# Altium PCB KNX-MultiExt.PcbDoc
Units mm, origin at the board's own origin, x right, y up, seen from the top; angles counter-clockwise.
Board outline 41.5 x 56.6 mm, 2 copper layers (Top Layer, Bottom Layer); 40 components, 27 nets, 123 pads, 29 vias.
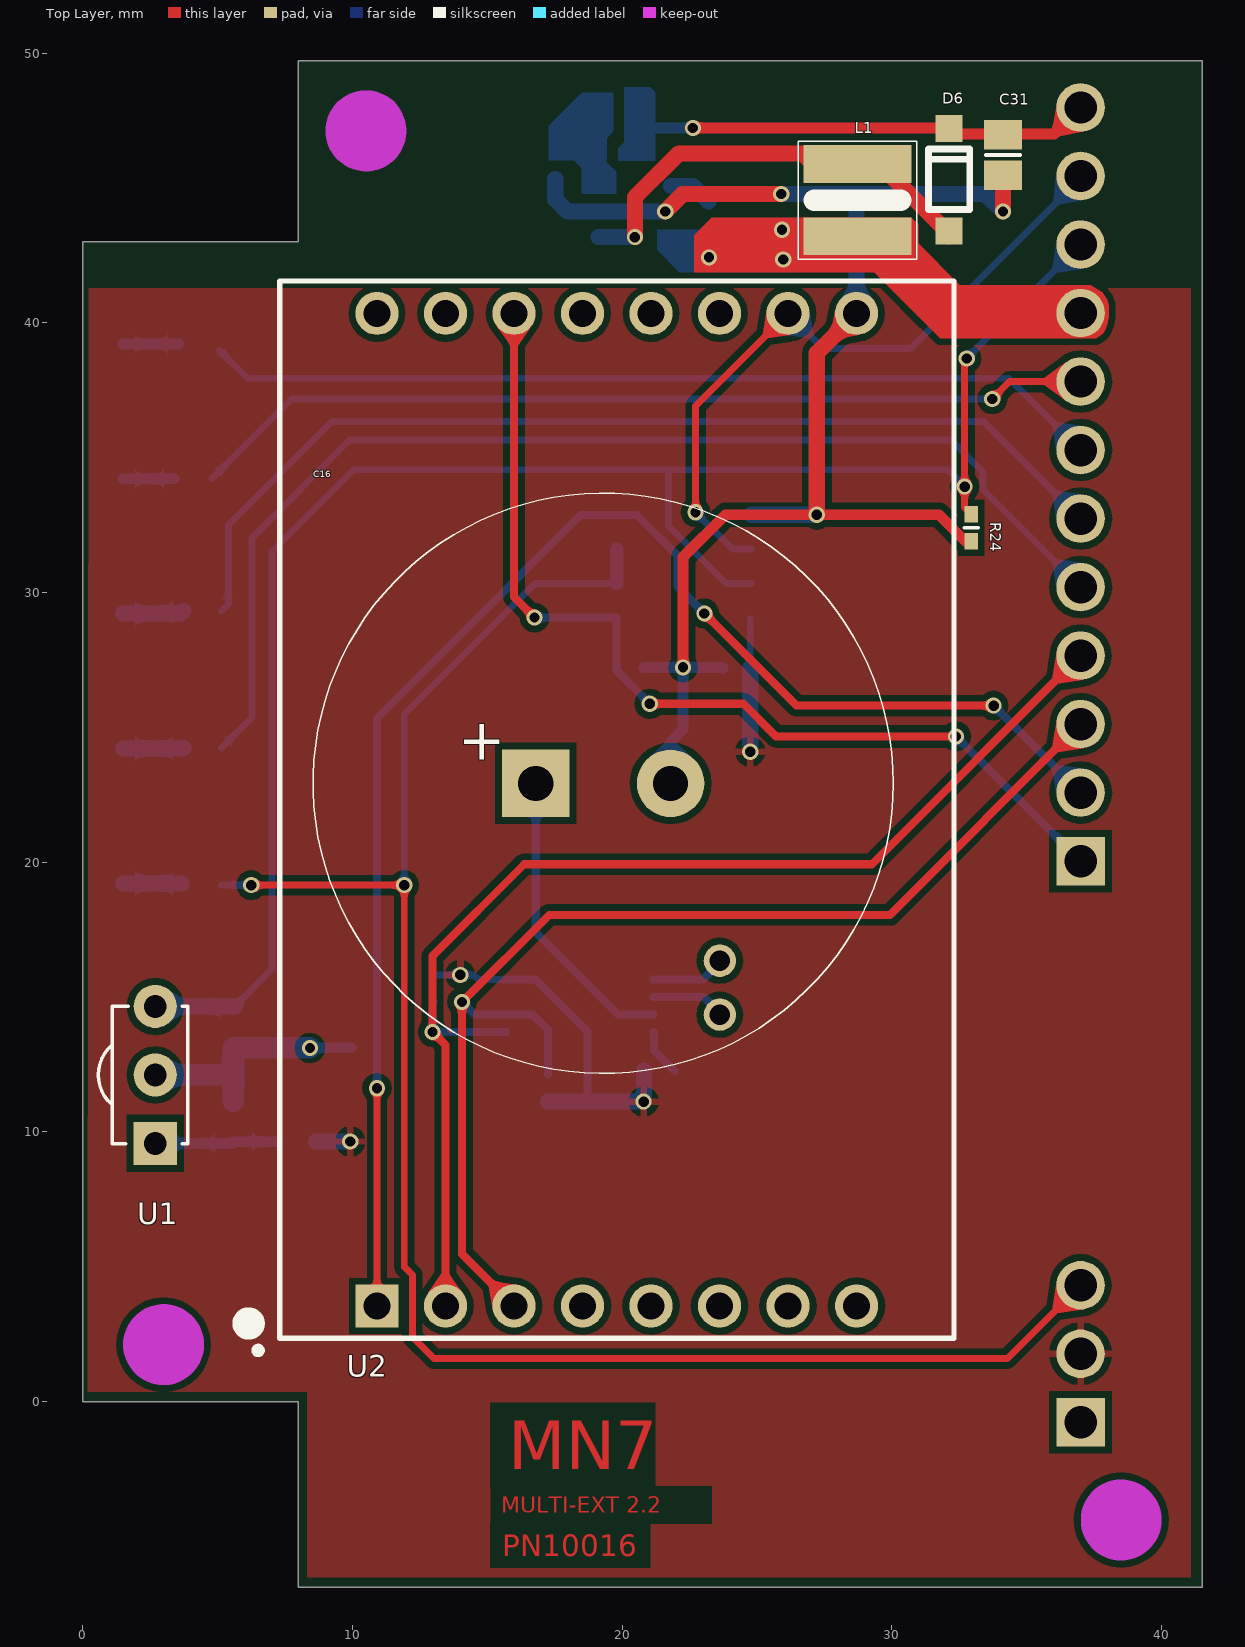
[diagram p0: Top Layer view]
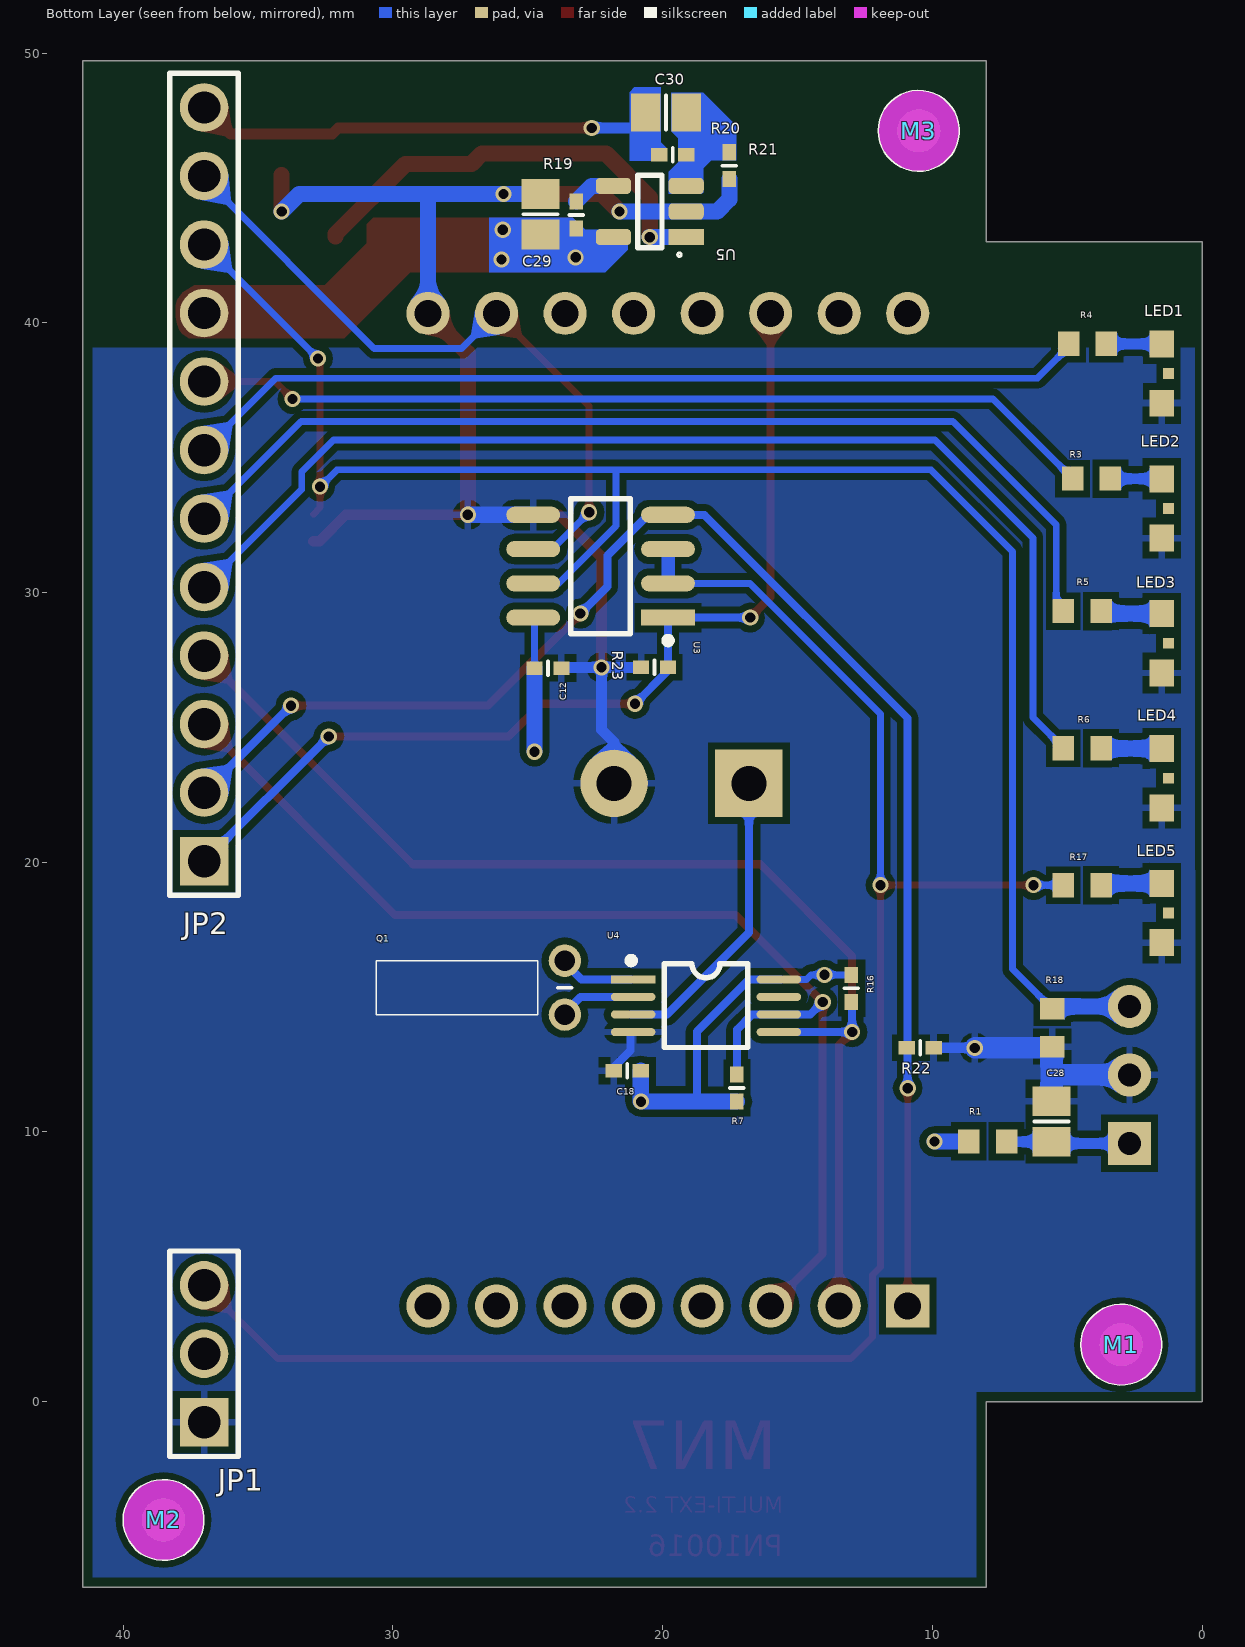
[diagram p1: Bottom Layer view, seen from below]
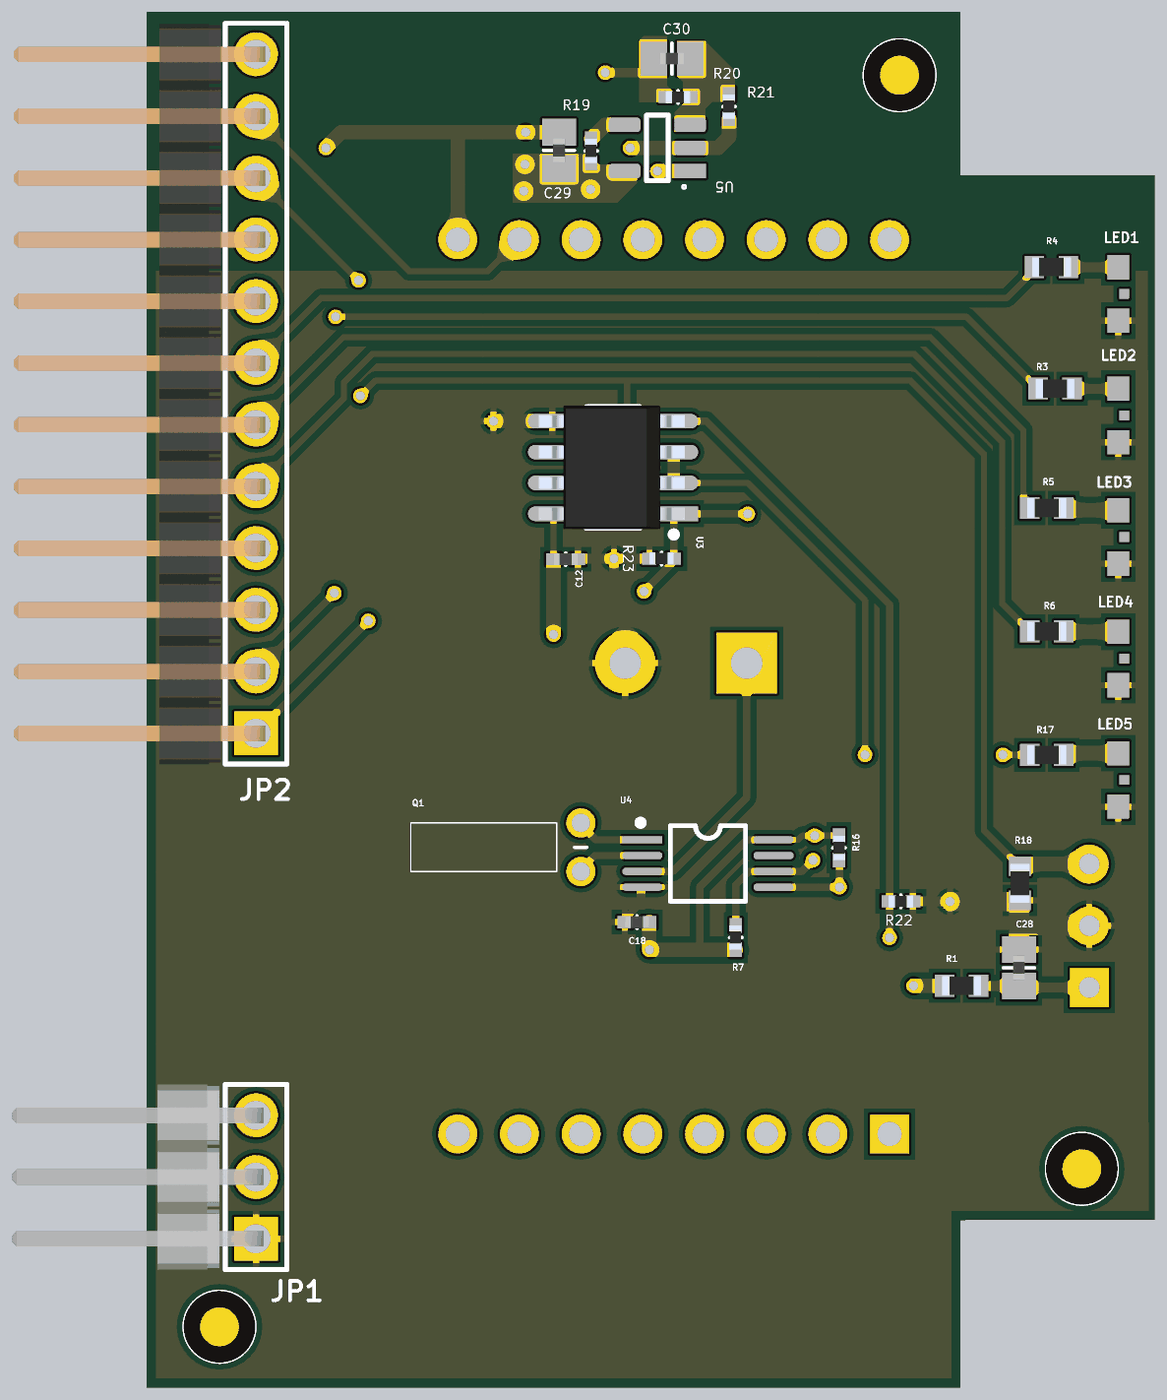
[diagram p2: 3D render of the assembled board from below, using the file's embedded part models]

## Layer stack, top to bottom
Top Solder: solder mask 0.0102, Solder Resist, Dk 3.5
Top Layer: signal copper 0.0356
Dielectric 1: dielectric 0.32, FR-4, Dk 4.8
Bottom Layer: signal copper 0.0356
Bottom Solder: solder mask 0.0102, Solder Resist, Dk 3.5

## Board outline
0,0 0,43.002 8.001,43.002 8.001,49.72 41.504,49.72 41.504,-6.883 8.001,-6.883 8.001,0

## Design rules (kind name [scope] priority, off if disabled: settings)
Clearance [All] p1: gap=0.254
ComponentClearance ComponentClearance_1 [(HasFootprint('KIMaip') AND HasFootprint('Goldcap_B'))] p1: gap=0 collisioncheckmode=3 verticalgap=0 showdistances=FALSE
ComponentClearance [All] p2: gap=0 collisioncheckmode=3 verticalgap=0 showdistances=FALSE
MinimumSolderMaskSliver [All] p1: minsoldermaskwidth=0.127
PolygonConnect [All] p1: connectstyle=Relief reliefconductorwidth=0.254 reliefentries=4 polygonreliefangle="90 Angle" airgapwidth=0.254
RoomDefinition KNX-MultiExt [InComponentClass('KNX-MultiExt')] p1: confinementstyle=ConfineIn formatcopy=TRUE lockcomponents=FALSE outline -2.6,-8.075 47.45,-8.075 47.45,51.625 -2.6,51.625
RoomDefinition KNX-MultiExt_2 [InComponentClass('KNX-MultiExt_2')] p2: confinementstyle=ConfineIn formatcopy=TRUE lockcomponents=FALSE outline -3.15,-9.575 46.125,-9.575 46.125,50.825 -3.15,50.825
RoutingVias [All] p1: holewidth=0.711 width=1.27 viastyle="Through Hole" minholewidth=0.25 minwidth=0.5 maxholewidth=0.711 maxwidth=1.27
SilkToBoardRegionClearance [(HasFootprint('Mark-3mm') AND IsEmbeddedBoard)] p1:
SilkToSilkClearance [All] p1: silktosilkclearance=0.2
SilkToSolderMaskClearance [IsPad] p1: minsilkscreentomaskgap=0.1 clearancetoexposedcopper=TRUE
SolderMaskExpansion [All] p1: expansion=0.102
UnpouredPolygon [All] p1: allowunpoured=FALSE
Width [All] p1: maxlimit=1 minlimit=0.254 preferedwidth=0.6
24 further rules are at their usual default settings.

## Classes and differential pairs
component class KNX-MultiExt: C28 C29 C30 C31 D6 JP1 JP2 L1 LED1 LED2 LED3 LED4 LED5 M1 M2 M3 R1 R3 R4 R5 R6 R17 R19 R20 R21 U1 U5
component class KNX-MultiExt_2: C12 C16 C18 Q1 R7 R16 R18 R22 R23 R24 U2 U3 U4

## Components (designator, comment, footprint, x,y, rotation, side; value= is the part's Value field where it differs from the comment)
C12 "100nF25V_0402" C0402 24.25,27.2 r180 bottom
C16 "1F5_5V5_POL" Goldcap_B 19.3,22.925 r0 top locked
C18 "100nF25V_0402" C0402 21.314,12.269 r0 bottom
C28 "47u6V3_0805" C0805 5.588,10.389 r90 bottom
C29 "4u7F25V_0805_Murata" C0805 24.525,44.025 r90 bottom
C30 "82pF50V_0805" C0805 19.875,47.8 r0 bottom
C31 "4u7F25V_0805_Murata_X7" C0805 34.125,46.225 r270 top
D6 "MBR0530T1G" SOD123 32.125,45.3 r90 top
JP1 "Plug_3_90_2.54" HDR1X3-DOWN 37,1.778 r90 bottom locked
JP2 "Plug_12_90_2.54" HDR1X12_2.54-Down 37,34.011 r90 bottom locked
L1 "15uH-WE-TPC" WE-TPC-3816 28.725,44.55 r90 top
LED1 "HSMG-120-Y" HSMA-120-OR 1.5,38.117 r270 bottom
LED2 "HSMG-120-GR" HSMA-120-G 1.5,33.117 r270 bottom
LED3 "HSMG-120-Y" HSMA-120-OR 1.5,28.117 r270 bottom
LED4 "HSMG-120-Y" HSMA-120-OR 1.5,23.117 r270 bottom
LED5 "HSMG-120-Y" HSMA-120-OR 1.5,18.117 r270 bottom
M1 "Mark" Mark-3mm 3,2.117 r180 bottom
M2 "Mark" Mark-3mm 38.504,-4.383 r180 bottom
M3 "Mark" Mark-3mm 10.504,47.117 r180 bottom
Q1 "Crystal_32k768Hz" VT-200 23.625,15.35 r180 bottom
R1 "47R_0603" R0603(1608) 7.95,9.65 r0 bottom
R3 "82R_0603" R0603(1608) 4.1,34.225 r0 bottom
R4 "82R_0603" R0603(1608) 4.25,39.225 r0 bottom
R5 "82R_0603" R0603(1608) 4.445,29.312 r0 bottom
R6 "82R_0603" R0603(1608) 4.445,24.232 r0 bottom
R7 "4k7_0402" R0402 17.25,11.634 r90 bottom
R16 "4k7_0402" R0402 13,15.325 r270 bottom
R17 "82R_0603" R0603(1608) 4.445,19.152 r0 bottom
R18 "0R_0603" R0603(1608) 5.554,13.867 r270 bottom
R19 "51k_0402" R0402 23.2,44 r90 bottom
R20 "249k_0402" R0402 19.625,46.225 r0 bottom
R21 "13k3_0402" R0402 17.525,45.825 r90 bottom
R22 "47k_0402" R0402 10.45,13.125 r0 bottom
R23 "47k_0402" R0402 20.3,27.225 r180 bottom
R24 "47k_0402" R0402 32.95,32.4 r90 top
U1 "GP1UX301QS" IR-GP 2.692,12.117 r270 top
U2 "KIMaip" KIMaip 19.805,21.95 r90 top locked
U3 "ADM3483ARZ" SOIC8_N 22.3,30.975 r90 bottom
U4 "DS1339U-33" uSOP8 18.393,14.682 r270 bottom
U5 "LM2733XMF" PDSO-G5 20.475,44.125 r0 bottom

## Footprints (in the part's own frame and the unit in brackets; to place one, negate y for a bottom-side part, rotate by r counter-clockwise, add the part's x,y. Pads: shape width x height; smd on the part's side, far side on the other; paste and mask are expansions set on the pad)
C0402 [mm] "Chip Capacitor, Body 1.0x0.5mm, IPC High Density"
  rect 0.6x0.5 smd: 1(-0.5,0) 2(0.5,0)
  silkscreen extent 0,-0.25 0,0.25, body extent -0.5,-0.25 0.5,0.25, height 0.5
C0805 [mm] "Chip Capacitor, Body 2.0x1.3mm, IPC High Density"
  rect 1.1x1.4 smd: 1(-0.75,0) 2(0.75,0)
  silkscreen extent 0,-0.64 0,0.64, body extent -0.5,-0.25 0.5,0.25, height 0.5
Goldcap_B [mm] "Capacitor, Body 21.5x9.5mm, IPC High Density"
  rect 2.5x2.5 hole 1.3: 1(-2.5,0)
  round 2.5 hole 1.3: 2(2.5,0)
  silkscreen extent -10.75,-10.76 10.76,10.76, body extent -10.67,-10.73 10.75,10.73, height 8
HDR1X3-DOWN [mm] "Connector; Header; 3 Position"
  rect 1.8x1.8 hole 1.2: 1(-2.54,0)
  round 1.8 hole 1.2: 2(0,0) 3(2.54,0)
  silkscreen extent -3.81,-1.27 3.81,1.27, body extent -3.81,-0.31 3.81,10.05, height 2.57
HDR1X12_2.54-Down [mm] "Connector; Header; 11 Position"
  rect 1.8x1.8 hole 1.2: 1(-13.97,0)
  round 1.8 hole 1.2: 2(-11.43,0) 3(-8.89,0) 4(-6.35,0) 5(-3.81,0) 6(-1.27,0) 7(1.27,0) 8(3.81,0) 9(6.35,0) 10(8.89,0) 11(11.43,0) 12(13.97,0)
  silkscreen extent -15.24,-1.27 15.24,1.27, body extent -15.25,-0.38 15.23,9.98, height 2.62
HSMA-120-G [mm] "GREEN"
  rect 1x0.9 smd: 1(1.1,0) 2(-1.1,0)
  rect 0.4x0.4 smd: 3(0,0.25)
  body extent -0.8,-0.2 0.8,0.85, height 0.6
HSMA-120-OR [mm] "OR"
  rect 1x0.9 smd: 1(1.1,0) 2(-1.1,0)
  rect 0.4x0.4 smd: 3(0,0.25)
  body extent -0.8,-0.2 0.8,0.85, height 0.6
IR-GP [mm]
  rect 1.6x1.6 hole 0.85: 1(2.54,0)
  round 1.6 hole 0.85: 2(0,0) 3(-2.54,0)
  silkscreen extent -2.55,-2.11 2.55,1.2, body extent -2.54,-1.6 2.54,1.2, height 8
KIMaip [mm]
  rect 1.6x1.6 hole 1: 1(-18.4,8.89)
  round 1.6 hole 1: 2(-18.4,6.35) 3(-18.4,3.81) 4(-18.4,1.27) 5(-18.4,-1.27) 6(-18.4,-3.81) 7(-18.4,-6.35) 8(-18.4,-8.89) 9(18.4,-8.89) 10(18.4,-6.35) 11(18.4,-3.81) 12(18.4,-1.27) 13(18.4,1.27) 14(18.4,3.81) 15(18.4,6.35) 16(18.4,8.89)
  silkscreen extent -20.17,-12.5 19.6,13.95, body extent -19.6,-12.55 19.6,12.55, height 8.5
Mark-3mm [mm]
  round 1.6 smd paste-2: 0(0,0)
  Keep-Out Layer circle w2: c0,0 r0.5
  silkscreen extent -1.5,-1.5 1.5,1.5
PDSO-G5 [mm]
  rect 1.3x0.6 smd: 1(-1.35,0.95)
  rrect50% 1.3x0.6 smd: 2(-1.35,0) 3(-1.35,-0.95) 4(1.35,-0.95) 5(1.35,0.95)
  silkscreen extent -1.17,-1.35 0.45,1.67, body extent -0.85,-1.35 0.85,1.35, height 0.7
R0402 [mm] "Chip Resistor, Body 1.0x0.5mm"
  rect 0.6x0.5 smd: 1(-0.5,0) 2(0.5,0)
  silkscreen extent 0,-0.25 0,0.25, body extent -0.5,-0.24 0.5,0.26, height 0.4
R0603(1608) [mm] "Chip Resistor, 0603"
  rect 0.8x0.9 smd: 1(-0.7,0) 2(0.7,0)
  body extent -0.8,-0.4 0.8,0.4, height 0.5
SOD123 [mm]
  rect 1x1 smd: 1(1.905,0) 2(-1.905,0)
  silkscreen extent -1.1,-0.76 1.14,0.76, body extent -1.4,-0.85 1.4,0.88, height 1.4
SOIC8_N [mm] "SOIC, 8-Leads, Body 4.9x3.9mm, Pitch 1.27mm, IPC Medium Density"
  rect 0.6x2 smd: 1(-1.905,-2.5)
  oval 0.6x2 smd: 2(-0.635,-2.5) 3(0.635,-2.5) 4(1.905,-2.5) 5(1.905,2.5) 6(0.635,2.5) 7(-0.635,2.5) 8(-1.905,2.5)
  silkscreen extent -2.88,-2.62 2.5,1.1, body extent -2.54,-2.95 2.54,3.05, height 1.7
uSOP8 [mm] "Shrink Small Outline, Plastic, Thin; 8 Leads; Body Width 4.4 mm; Pitch 0.65 mm"
  rect 0.3x1.65 smd: 1(-0.975,-2.7)
  oval 0.3x1.65 smd: 2(-0.325,-2.7) 3(0.325,-2.7) 4(0.975,-2.7) 5(0.975,2.7) 6(0.325,2.7) 7(-0.325,2.7) 8(-0.975,2.7)
  silkscreen extent -1.8,-2.9 1.55,1.55, body extent -1.52,-1.52 1.52,1.52, height 1
VT-200 [mm] "Crystal, 32.768kHz"
  round 1.2 hole 0.762: 1(0,1) 2(0,-1)
  silkscreen extent -7,-1 0.25,1, body extent -6.98,-0.97 -0.98,1.02, height 2.09
WE-TPC-3816 [mm] "Chip , Body 5.7x6.4mm, IPC High Density"
  rect 1.4x4 smd: 1(-1.338,0) 2(1.338,0)
  silkscreen extent -2.2,-2.2 2.19,2.2, body extent -1.89,-1.9 1.91,1.9, height 1.7

## Part data
C12 C18: "AVX, X5R, 10%, 25V"
C16: "Panasonic, F series"
C28: "Kemet  C series, X5R, 20%, 6.3V"
C29: "GRM series, X5R, 10%, 25V"
C30: "C0G series, 5%, 50V"
C31: "GRM series, X7R, 10%, 50V"
D6: "Diode Schottky,2A,40V"
JP1: "Plug,-3-Pin"
JP2: "Plug, 11-Pin"
L1: "Coil, 15uH, 0.65A"
LED1 LED3 LED4 LED5: "LED, 90°, yellow"
LED2: "LED, 90°, green"
Q1: "Crystal, 32.768kHz"
R1 R3 R4 R5 R6 R17: "Vishay, CRCW series, 100mW, 1%"
R7 R16 R19 R20 R21 R22 R23 R24: "Vishay CRCW series, 63mW, 1%"
R18: "Vishay, CRCW series, 100mW"
U1: "IR reseiver"
U2: "PoE, 12V"
U3: "Transceiver, RS485/422"
U4: "RTC"
U5: "TI, buck boost converter, 1A max"

## Via types
v1: diameter 0.6, hole 0.381, Top Layer to Bottom Layer, 29 vias

## Nets (pads, with @x,y where several pads share a name; then routed paths per layer and width w, separated by ;. In a path a pad name is that pad's centre, name@x,y a point inside that pad or via, vN(x,y) a via of type N, cw(c..) or ccw(c..) an arc to the next point about the centre after c; other vN are vias at no path point)
GND_EXT: C12.2 C16.2 C18.2 C28.2 C29.2 C31.2 JP1.1 LED1.1 LED2.1 LED3.1 LED4.1 LED5.1 R18.2 R21.1 R22.1 R23.1 R24.1 U1.2 U2.9 U3.5 U4.4 U5.2 | length 70
  Top Layer w0.4: v1(22.262,27.225) 22.262,31.312 23.83,32.88 v1(27.22,32.88) 31.745,32.88 32.725,31.9 R24.1
  Top Layer w0.6: v1(21.6,44.125) 22.25,44.775 v1(25.9,44.775) ; v1(27.22,32.88) 27.22,38.875 U2.9 ; v1(34.125,44.125) C31.2
  Bottom Layer w0.3: U4.4@21.168,13.707 21.187,13.688 21.187,13.023 C18.2@21.949,12.261
  Bottom Layer w0.4: v1@8.404,13.118 8.411,13.125 R22.1 ; R23.1 v1(22.262,27.225) ; C16.2 21.8,24.45 22.262,24.912 v1(22.262,27.225) ; C12.2 23.725,27.225 v1(22.262,27.225)
  Bottom Layer w0.6: R21.1 17.525,44.575 17.975,44.125 U5.2 v1(21.6,44.125) ; C29.2 v1(25.9,44.775) 28.725,44.775 ; U3.5 v1(27.22,32.88) ; U2.9 28.695,44.745 28.725,44.775 ; v1(34.125,44.125) 33.475,44.775 28.725,44.775
  Bottom Layer w0.8: U1.2 5.588,12.117 ; C28.2 5.588,12.117 ; v1@8.404,13.118 5.588,13.118 5.588,12.117
  other v1: 8.429,13.117
NetC12_1: C12.1 C18.1 JP1.2 R1.2 R7.1 R16.1 U3.8 U4.8 | length 20.1
  Bottom Layer w0.254: R16.1 14.5,15.825 14.668,15.657 U4.8@15.618,15.657 ; C12.1 U3.8@24.75,29.02
  Bottom Layer w0.3: U4.8@15.618,15.657 U4.8 16.793,15.657 18.725,13.725 18.725,11.126
  Bottom Layer w0.6: R1.2 v1(9.925,9.65) ; R7.1@17.25,11.126 18.725,11.126 20.806,11.126 20.814,11.134 C18.1 ; v1@24.75,24.125 C12.1
  other v1: 20.8,11.125 14,15.825 24.75,24.1
NetC16_1: C16.1 U4.3 | length 11.2
  Bottom Layer w0.3: C16.1 16.8,17.395 19.839,14.357 U4.3 U4.3@21.168,14.357
NetC28_1: C28.1 R1.1 U1.1 | length 4.5
  Bottom Layer w0.4: U1.1 C28.1@5.526,9.577 ; C28.1 7.239,9.639 R1.1
NetC29_1: C29.1 JP2.9 L1.1 R19.1 U5.5 | length 9.4
  Top Layer w1: L1.1@28.75,43.175 31.564,40.361 JP2.9
  other v1: 25.975,42.35 23.225,42.425 25.925,43.45
NetC30_1: C30.1 R20.1 R21.2 U5.3 | length 4.3
  Bottom Layer w0.5: R21.2 R20.1@19.125,46.325 ; U5.3 R20.1@19.125,46.325 ; C30.1 19.15,47.775 19.15,46.35 R20.1@19.125,46.325
NetC30_2: C30.2 C31.1 D6.1 JP2.12 R20.2 | length 18.6
  Top Layer w0.4: v1(22.625,47.225) 32.025,47.225 32.25,47 36.019,47 JP2.12
  Bottom Layer w0.4: C30.2@20.625,47.15 20.7,47.225 v1(22.625,47.225)
  Bottom Layer w0.5: R20.2@20.15,46.35 20.625,46.825 20.625,47.15 C30.2
NetD6_2: D6.2 L1.2 U5.1 | length 16.5
  Top Layer w0.6: v1(20.475,43.175) 20.475,44.65 22.1,46.275 26.7,46.275 27.087,45.888 L1.2 29.533,45.888 32.125,43.296 D6.2@32.125,43.195
  Bottom Layer w0.6: U5.1 v1(20.475,43.175)
NetJP1_3: JP1.3 R17.2 U3.2 U3.3 | length 67.4
  Top Layer w0.254: v1(6.25,19.152) v1(11.925,19.152) 11.925,5 12.225,4.7 12.225,2.4 13.025,1.6 34.282,1.6 JP1.3
  Bottom Layer w0.254: R17.2 v1(6.25,19.152) ; v1(11.925,19.152) 11.925,25.5 16.765,30.34 U3.2
  Bottom Layer w0.5: U3.2 U3.3
NetJP2_1: JP2.1 R23.2 U2.14 U3.1 | length 36.7
  Top Layer w0.3: U2.14 15.995,29.83 v1(16.755,29.07) ; v1(21.025,25.875) 24.5,25.875 25.709,24.666 v1(32.375,24.666)
  Bottom Layer w0.3: v1(16.755,29.07) U3.1 R23.2 19.8,27.104 21.025,25.879 v1(21.025,25.875) ; v1(32.375,24.666) JP2.1
NetJP2_2: JP2.2 R22.2 U2.1 U3.4 | length 56
  Top Layer w0.254: U2.1 v1(10.915,11.625)
  Top Layer w0.3: U2.1 U2.1@10.925,3.54 ; v1(23.05,29.225) 26.469,25.806 v1(33.775,25.806)
  Bottom Layer w0.3: v1(10.915,11.625) 10.915,25.34 18.455,32.88 U3.4 20.545,32.88 22.05,31.375 22.05,30.225 v1(23.05,29.225) ; v1(33.775,25.806) JP2.2
NetJP2_3: JP2.3 R7.2 U2.3 U4.6 | length 44.5
  Top Layer w0.3: U2.3 14.067,5.478 v1(14.067,14.817) 17.3,18.05 29.929,18.05 JP2.3
  Bottom Layer w0.3: v1(14.067,14.817) 14.527,14.357 U4.6 16.686,14.357 17.25,13.793 R7.2
NetJP2_4: JP2.4 R16.2 U2.2 U4.5 | length 45.7
  Top Layer w0.3: U2.2 13.455,13.227 v1(12.975,13.707) 12.975,16.525 16.375,19.925 29.264,19.925 JP2.4
  Bottom Layer w0.3: R16.2 12.975,14.8 v1(12.975,13.707) U4.5
NetJP2_5: JP2.5 R6.2 | length 43.1
  Bottom Layer w0.254: R6.2 6.275,25.362 6.275,32.025 9.9,35.65 32.2,35.65 33.381,34.469 33.381,33.82 JP2.5
NetJP2_6: JP2.6 R5.2 | length 38
  Bottom Layer w0.254: R5.2 5.407,29.574 5.407,32.507 9.242,36.342 33.399,36.342 JP2.6
NetJP2_7: JP2.7 R4.2 | length 33.5
  Bottom Layer w0.254: R4.2@5.075,38.975 6.104,37.946 34.335,37.946 JP2.7
NetJP2_8: JP2.8 R3.2 | length 33.7
  Top Layer w0.254: v1(33.725,37.175) 34.371,37.821 JP2.8
  Bottom Layer w0.254: R3.2 7.75,37.175 v1(33.725,37.175)
NetJP2_10: JP2.10 R18.1 R24.2 U1.3 U3.7 | length 65.6
  Top Layer w0.254: v1(32.775,38.676) 32.7,38.601 v1(32.7,33.925) 32.7,33.15 R24.2
  Bottom Layer w0.254: R18.1@5.644,14.657 7.025,16.038 7.025,31.525 10.05,34.55 21.725,34.55 ; U3.7 23.86,30.34 21.725,32.475 21.725,34.55 ; v1(32.7,33.925) 32.075,34.55 21.725,34.55 ; v1(32.775,38.676) JP2.10
  Bottom Layer w0.4: R18.1 R18.1@5.644,14.657
  Bottom Layer w0.6: U1.3 R18.1@5.644,14.657
NetJP2_11: JP2.11 U2.10 U3.6 | length 25.6
  Top Layer w0.254: v1(22.725,32.975) 22.725,36.92 U2.10
  Bottom Layer w0.254: v1(22.725,32.975) 24.09,31.61 U3.6 ; U2.10 27.455,39.05 30.693,39.05 JP2.11@37.084,45.441
NetLED1_2: LED1.2 R4.1 | length 2.1
  Bottom Layer w0.4: LED1.2 3.542,39.217 R4.1
NetLED2_2: LED2.2 R3.1 | length 1.9
  Bottom Layer w0.4: LED2.2 3.392,34.217 R3.1
NetLED3_2: LED3.2 R5.1 | length 2.3
  Bottom Layer w0.6: LED3.2 3.65,29.217 R5.1
NetLED4_2: LED4.2 R6.1 | length 2.3
  Bottom Layer w0.6: LED4.2 3.73,24.217 R6.1
NetLED5_2: LED5.2 R17.1 | length 2.2
  Bottom Layer w0.6: LED5.2 R17.1@3.68,19.217
NetQ1_1: Q1.1 U4.1 | length 2.8
  Bottom Layer w0.3: U4.1@21.168,15.657 23.007,15.657 Q1.1@23.7,16.35
NetQ1_2: Q1.2 U4.2 | length 2.8
  Bottom Layer w0.3: U4.2@21.168,15.007 23.043,15.007 Q1.2@23.7,14.35
NetR19_2: R19.2 U5.4 | length 1.6
  Bottom Layer w0.6: U5.4 22.625,45.075 R19.2
pads on no net: LED1.3 LED2.3 LED3.3 LED4.3 LED5.3 M1.0 M2.0 M3.0 U2.4 U2.5 U2.6 U2.7 U2.8 U2.11 U2.12 U2.13 U2.15 U2.16 U4.7

## Polygon pours and split planes (outlines as drawn)
GND_EXT on Bottom Layer "GND" (solid, pour order 4): 0.25,0.375 8.375,0.375 8.375,-6.5 41.125,-6.5 41.125,38.375 41.125,39.075 0.275,39.075
NetC12_1 on Top Layer "3V3" (solid, pour order 3): 0.2,0.375 8.325,0.375 8.325,-6.5 41.075,-6.5 41.075,38.375 41.075,41.275 0.227,41.275

## Other copper
Top Layer:
  region net NetC29_1: 28.275,42.95 31.802,39.423 37.57,39.423 37.817,39.588 37.893,39.702 37.995,39.947 38.05,40.226 38.05,40.643 37.987,40.849 37.8,41.125 37.373,41.4 32.525,41.4 30.975,42.95
  region net NetC29_1: 22.675,41.875 30.45,41.875 30.975,42.4 30.975,43.65 30.725,43.9 23.641,43.9 23.325,43.9 23.101,43.676 22.675,43.25
  text "MN7" at 15.775,-2.5 h1.8
  text "MULTI-EXT 2.2" at 15.525,-4.125 h0.6
  text "PN10016" at 15.55,-5.725 h0.8
Bottom Layer:
  region net NetC30_1: 17.275,46.025 18.2,46.025 18.5,45.725 18.5,44.825 18.55,44.775 19.775,44.775 19.775,45.6 19.4,45.975 19.425,46 19.425,46.85 19.675,47.1 19.675,48.525 18.5,48.525 17.275,47.3
  region net NetC30_2: 20.075,46.7 19.85,46.475 19.85,46 21.225,46 21.225,48.55 21.05,48.725 20.075,48.725
  region net NetC29_1: 21.3,43.45 21.3,42.7 22.125,41.875 26.425,41.875 26.425,43.9 23.325,43.9 22.875,43.45

## Silkscreen, mask and mechanical layers (free items; w line width, h text height)
Top Solder:
  text "MN7" at 15.775,-2.5 h1.8
  text "MULTI-EXT 2.2" at 15.525,-4.125 h0.6
  text "PN10016" at 15.55,-5.725 h0.8
Mechanical 1:
  lines w0.05: 0,0 0,0
Outline:
  the board outline again, w0.254

## Dimensions
37,20.041 to 41.504,-6.883 on Mechanical 9
41.504,-6.883 to 41.504,49.72 on Mechanical 9

## Text inside footprints (layer, text, board x,y; h text height)
C16: Top Overlay "+" at 13.925,23.8 h1.52